# Altium PCB 74HC595.PcbDoc
Units mil, origin at the board's own origin, x right, y up, seen from the top; angles counter-clockwise.
Board outline 450 x 3200 mil, 2 copper layers (Top Layer, Bottom Layer); 74 components, 74 nets, 204 pads, 68 vias.
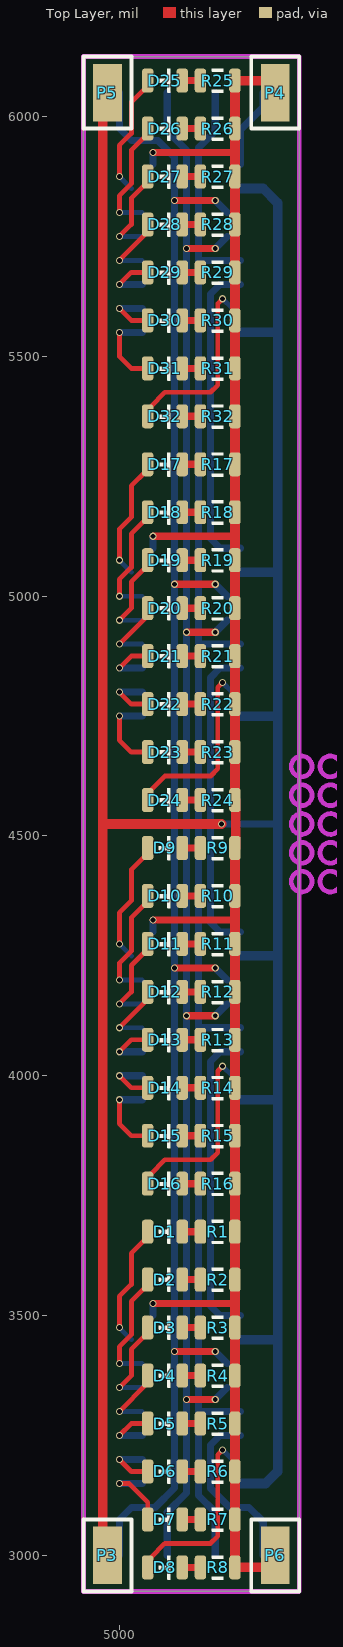
[diagram p0: Top Layer view]
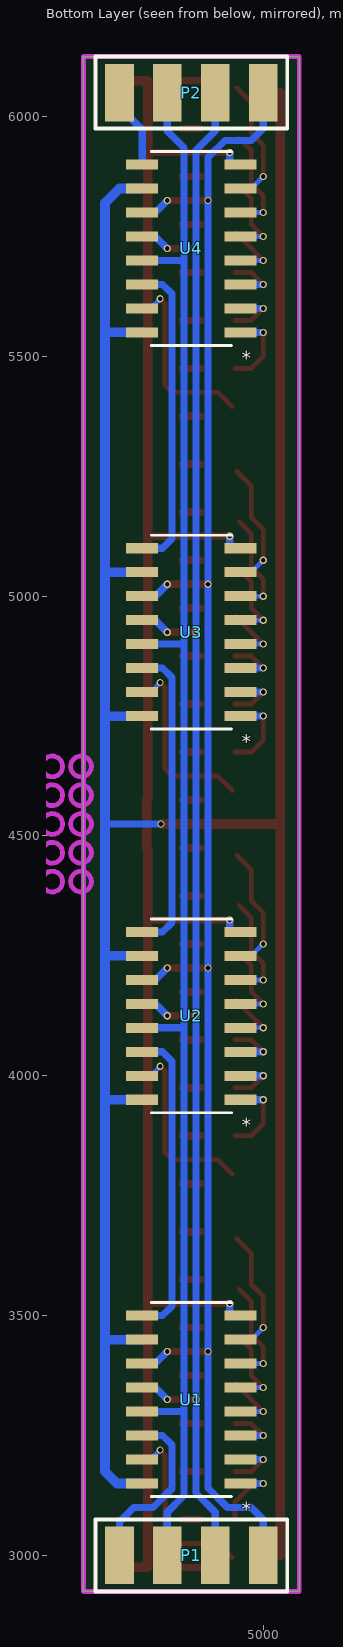
[diagram p1: Bottom Layer view, seen from below]
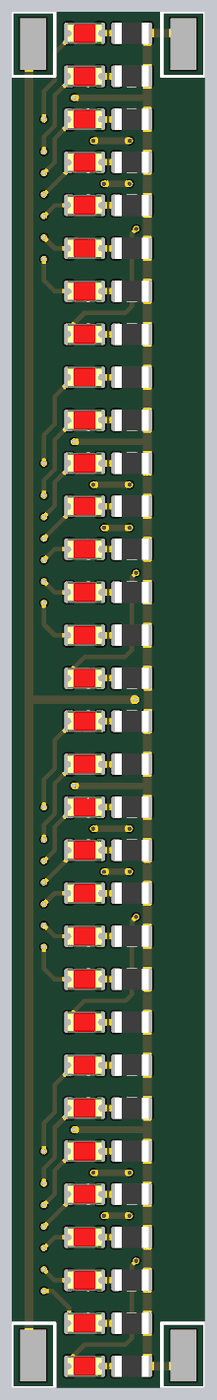
[diagram p2: 3D render of the assembled board from above, using the file's embedded part models]
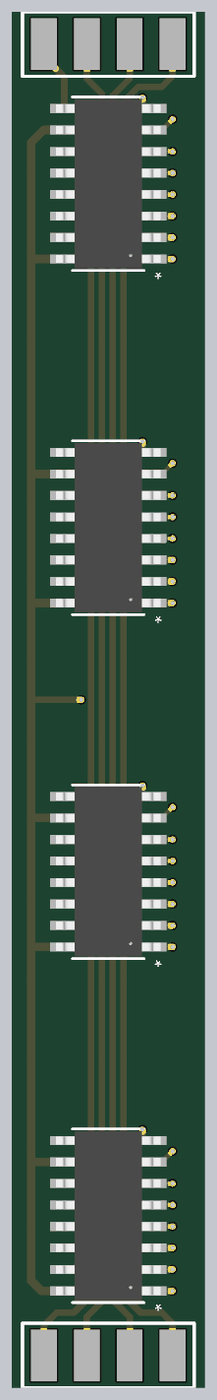
[diagram p3: 3D render of the assembled board from below, using the file's embedded part models]

## Layer stack, top to bottom
Top Solder: solder mask 0.4, Solder Resist, Dk 3.5
Top Layer: signal copper 1.4
Dielectric 1: dielectric 12.6, FR-4, Dk 4.8
Bottom Layer: signal copper 1.4
Bottom Solder: solder mask 0.4, Solder Resist, Dk 3.5

## Board outline
4925,2925 4925,6125 5375,6125 5375,2925

## Design rules (kind name [scope] priority, off if disabled: settings)
Clearance [All] p1: gap=8
PolygonConnect [All] p1: connectstyle=Relief reliefconductorwidth=10 reliefentries=4 polygonreliefangle="90 Angle" airgapwidth=10
RoutingVias [All] p1: holewidth=10 width=15 viastyle="Through Hole" minholewidth=8 minwidth=10 maxholewidth=50 maxwidth=60
SolderMaskExpansion [All] p1: expansion=4
Width [All] p1: maxlimit=50 minlimit=10 preferedwidth=15
30 further rules are at their usual default settings.

## Components (designator, comment, footprint, x,y, rotation, side; value= is the part's Value field where it differs from the comment)
D1 "color?" LED_0805_RED 5095,3675 r180 top
D2 "color?" LED_0805_RED 5095,3575 r180 top
D3 "color?" LED_0805_RED 5095,3475 r180 top
D4 "color?" LED_0805_RED 5095,3375 r180 top
D5 "color?" LED_0805_RED 5095,3275 r180 top
D6 "color?" LED_0805_RED 5095,3175 r180 top
D7 "color?" LED_0805_RED 5095,3075 r180 top
D8 "color?" LED_0805_RED 5095,2975 r180 top
D9 "color?" LED_0805_RED 5095,4475 r180 top
D10 "color?" LED_0805_RED 5095,4375 r180 top
D11 "color?" LED_0805_RED 5095,4275 r180 top
D12 "color?" LED_0805_RED 5095,4175 r180 top
D13 "color?" LED_0805_RED 5095,4075 r180 top
D14 "color?" LED_0805_RED 5095,3975 r180 top
D15 "color?" LED_0805_RED 5095,3875 r180 top
D16 "color?" LED_0805_RED 5095,3775 r180 top
D17 "color?" LED_0805_RED 5095,5275 r180 top
D18 "color?" LED_0805_RED 5095,5175 r180 top
D19 "color?" LED_0805_RED 5095,5075 r180 top
D20 "color?" LED_0805_RED 5095,4975 r180 top
D21 "color?" LED_0805_RED 5095,4875 r180 top
D22 "color?" LED_0805_RED 5095,4775 r180 top
D23 "color?" LED_0805_RED 5095,4675 r180 top
D24 "color?" LED_0805_RED 5095,4575 r180 top
D25 "color?" LED_0805_RED 5095,6075 r180 top
D26 "color?" LED_0805_RED 5095,5975 r180 top
D27 "color?" LED_0805_RED 5095,5875 r180 top
D28 "color?" LED_0805_RED 5095,5775 r180 top
D29 "color?" LED_0805_RED 5095,5675 r180 top
D30 "color?" LED_0805_RED 5095,5575 r180 top
D31 "color?" LED_0805_RED 5095,5475 r180 top
D32 "color?" LED_0805_RED 5095,5375 r180 top
P1 "Header 4" HDR1X4_SOP 5000,3000 r0 bottom locked
P2 "Header 4" HDR1X4_SOP 5000,6050 r0 bottom locked
P3 "Header 1" HDR1X1_SOP 4975,3000 r0 top locked
P4 "Header 1" HDR1X1_SOP 5325,6050 r0 top locked
P5 "Header 1" HDR1X1_SOP 4975,6050 r0 top locked
P6 "Header 1" HDR1X1_SOP 5325,3000 r0 top locked
R1 "R0805" RES_0805 5205,3675 r0 top
R2 "R0805" RES_0805 5205,3575 r0 top
R3 "R0805" RES_0805 5205,3475 r0 top
R4 "R0805" RES_0805 5205,3375 r0 top
R5 "R0805" RES_0805 5205,3275 r0 top
R6 "R0805" RES_0805 5205,3175 r0 top
R7 "R0805" RES_0805 5205,3075 r0 top
R8 "R0805" RES_0805 5205,2975 r0 top
R9 "R0805" RES_0805 5205,4475 r0 top
R10 "R0805" RES_0805 5205,4375 r0 top
R11 "R0805" RES_0805 5205,4275 r0 top
R12 "R0805" RES_0805 5205,4175 r0 top
R13 "R0805" RES_0805 5205,4075 r0 top
R14 "R0805" RES_0805 5205,3975 r0 top
R15 "R0805" RES_0805 5205,3875 r0 top
R16 "R0805" RES_0805 5205,3775 r0 top
R17 "R0805" RES_0805 5205,5275 r0 top
R18 "R0805" RES_0805 5205,5175 r0 top
R19 "R0805" RES_0805 5205,5075 r0 top
R20 "R0805" RES_0805 5205,4975 r0 top
R21 "R0805" RES_0805 5205,4875 r0 top
R22 "R0805" RES_0805 5205,4775 r0 top
R23 "R0805" RES_0805 5205,4675 r0 top
R24 "R0805" RES_0805 5205,4575 r0 top
R25 "R0805" RES_0805 5205,6075 r0 top
R26 "R0805" RES_0805 5205,5975 r0 top
R27 "R0805" RES_0805 5205,5875 r0 top
R28 "R0805" RES_0805 5205,5775 r0 top
R29 "R0805" RES_0805 5205,5675 r0 top
R30 "R0805" RES_0805 5205,5575 r0 top
R31 "R0805" RES_0805 5205,5475 r0 top
R32 "R0805" RES_0805 5205,5375 r0 top
U1 "74HC595D,112" SOT109-1_NEX 5150,3325 r0 bottom locked
U2 "74HC595D,112" SOT109-1_NEX 5150,4125 r0 bottom locked
U3 "74HC595D,112" SOT109-1_NEX 5150,4925 r0 bottom locked
U4 "74HC595D,112" SOT109-1_NEX 5150,5725 r0 bottom

## Footprints (in the part's own frame and the unit in brackets; to place one, negate y for a bottom-side part, rotate by r counter-clockwise, add the part's x,y. Pads: shape width x height; smd on the part's side, far side on the other; paste and mask are expansions set on the pad)
HDR1X1_SOP [mil]
  rect 60x120 smd: 1(0,0)
  silkscreen extent -50,-75 50,75
HDR1X4_SOP [mil]
  rect 60x120 smd: 1(0,0) 2(100,0) 3(200,0) 4(300,0)
  silkscreen extent -50,-75 350,75
LED_0805_RED [mil]
  rrect50% 24x50 smd: 1(-36,0) 2(36,0)
  silkscreen extent -12,-24 12,24, body extent -40,-25 40,25, height 43
RES_0805 [mil]
  rrect50% 24x50 smd: 1(-36,0) 2(36,0)
  silkscreen extent -12,-24 12,24, body extent -39,-25 39,25, height 24
SOT109-1_NEX [mil]
  rect 67x21 smd paste+0 mask+0: 1(-102.5,175) 2(-102.5,125) 3(-102.5,75) 4(-102.5,25) 5(-102.5,-25) 6(-102.5,-75) 7(-102.5,-125) 8(-102.5,-175) 9(102.5,-175) 10(102.5,-125) 11(102.5,-75) 12(102.5,-25) 13(102.5,25) 14(102.5,75) 15(102.5,125) 16(102.5,175)
  silkscreen extent -84,-202 84,202, body extent -122,-197 122,197, height 69

## Part data
D1 D2 D3 D4 D5 D6 D7 D8 D9 D10 D11 D12 D13 D14 D15 D16 D17 D18 D19 D20 D21 D22 D23 D24 D25 D26 D27 D28 D29 D30 D31 D32: library part LED_0805, "LED"
P1 P2: "Header, 4-Pin"
P3 P4 P5 P6: "Header, 1-Pin"
R1 R2 R3 R4 R5 R6 R7 R8 R9 R10 R11 R12 R13 R14 R15 R16 R17 R18 R19 R20 R21 R22 R23 R24 R25 R26 R27 R28 R29 R30 R31 R32: library part Res_0805, "Resistor"
U1 U2 U3 U4: "No Description Available"

## Via types
v1: diameter 15, hole 10, Top Layer to Bottom Layer, 68 vias

## Nets (pads, with @x,y where several pads share a name; then routed paths per layer and width w, separated by ;. In a path a pad name is that pad's centre, name@x,y a point inside that pad or via, vN(x,y) a via of type N, cw(c..) or ccw(c..) an arc to the next point about the centre after c; other vN are vias at no path point)
BITOUT_A: U1.9 U2.14 | length 722.4
  Bottom Layer w15: U1.9 5210,3500 5190,3520 5190,4030 ; 5190,4030 5210,4050 ; 5190,4030 5210,4050 ; 5210,4050 U2.14 5210,4050
BITOUT_B: U2.9 U3.14 | length 793.1
  Bottom Layer w15: U2.9 5210,4300 5190,4320 5190,4830 ; 5190,4830 5210,4850 ; 5190,4830 5210,4850 ; 5190,4830 5210,4850 ; 5210,4850 U3.14 ; 5210,4850 U3.14 ; 5210,4850 U3.14
BITOUT_C: U3.9 U4.14 | length 722.4
  Bottom Layer w15: U4.14 5210,5650 5190,5630 5190,5120 ; 5190,5120 5210,5100 ; 5190,5120 5210,5100 ; 5210,5100 U3.9 5210,5100
BITOUT_D: P2.4 U4.9 | length 169.7
  Bottom Layer w15: U4.9 5252.5,5972.5 5300,6020 P2.4
BITSCLK: P1.1 P2.1 U1.11 U2.11 U3.11 U4.11 | length 3688.2
  Top Layer w15: v1(5115,3425) v1(5200,3425) ; v1(5115,4225) v1(5200,4225) ; v1(5115,5025) v1(5200,5025) ; v1(5115,5825) v1(5200,5825)
  Bottom Layer w15: P1.1 5000,3075 5025,3100 5075,3100 5075,3100.36 5115,3140.36 v1(5115,4225) v1(5115,5025) v1(5115,5825) 5115,5915 5080,5950 5025,5950 5000,5975 P2.1 ; v1(5200,3425) U1.11@5225,3400 ; v1(5200,4225) U2.11@5225,4200 ; v1(5200,5025) U3.11@5225,5000 ; v1(5200,5825) U4.11@5225,5800
DATAINPUT: P1.4 U1.14 | length 440.6
  Bottom Layer w15: P1.4 5300,3070 5270,3100 5230,3100 5190,3140 5190,3230 ; 5190,3230 5210,3250 ; 5190,3230 5210,3250 ; 5210,3250 U1.14 5210,3250
GND: P4.1 P6.1 R1.2 R2.2 R3.2 R4.2 R5.2 R6.2 R7.2 R8.2 R9.2 R10.2 R11.2 R12.2 R13.2 R14.2 R15.2 R16.2 R17.2 R18.2 R19.2 R20.2 R21.2 R22.2 R23.2 R24.2 R25.2 R26.2 R27.2 R28.2 R29.2 R30.2 R31.2 R32.2 U1.8 U2.8 U3.8 U4.8 | length 4002
  Top Layer w15: v1(5070,3525) 5241,3525 ; v1(5070,4325) 5241,4325 ; v1(5070,5125) 5241,5125 ; v1(5070,5925) 5241,5925
  Top Layer w20: R9.2 R10.2 5241,4325 R11.2 R12.2 R13.2 R14.2 R15.2 R16.2 R1.2 R2.2 5241,3525 R3.2 R4.2 R5.2 R6.2 R7.2 R8.2 P6.1@5300,2975 ; R24.2 R23.2 R22.2 R21.2 R20.2 R19.2 5241,5125 R18.2 R17.2 R32.2 R31.2 R30.2 R29.2 R28.2 R27.2 5241,5925 R26.2 R25.2 P4.1@5300,6075 ; R9.2@5243,4475 R24.2@5243,4575
  Bottom Layer w15: U1.8@5070,3500 v1(5070,3525) ; U2.8@5070,4300 v1(5070,4325) ; U3.8@5070,5100 v1(5070,5125) ; U4.8@5070,5900 v1(5070,5925)
MEMSCLK: P1.2 P2.2 U1.12 U2.12 U3.12 U4.12 | length 3464.6
  Top Layer w15: v1(5140,3325) v1(5200,3325) ; v1(5140,4125) v1(5200,4125) ; v1(5140,4925) v1(5200,4925) ; v1(5140,5725) v1(5200,5725)
  Bottom Layer w15: P1.2 5100,3090 5140,3130 v1(5140,4125) v1(5140,4925) v1(5140,5725) 5140,5930 5100,5970 P2.2 ; v1(5200,3325) U1.12@5225,3350 ; v1(5200,4125) U2.12@5225,4150 ; v1(5200,4925) U3.12@5225,4950 ; v1(5200,5725) U4.12@5225,5750
NetD1_1: D1.1 R1.1 | length 39
  Top Layer w15: D1.1@5130,3675 R1.1
NetD2_1: D2.1 R2.1 | length 39
  Top Layer w15: D2.1@5130,3575 R2.1
NetD3_1: D3.1 R3.1 | length 39
  Top Layer w15: D3.1@5130,3475 R3.1
NetD4_1: D4.1 R4.1 | length 39
  Top Layer w15: D4.1@5130,3375 R4.1
NetD5_1: D5.1 R5.1 | length 39
  Top Layer w15: D5.1@5130,3275 R5.1
NetD6_1: D6.1 R6.1 | length 39
  Top Layer w15: D6.1@5130,3175 R6.1
NetD7_1: D7.1 R7.1 | length 39
  Top Layer w15: D7.1@5130,3075 R7.1
NetD8_1: D8.1 R8.1 | length 39
  Top Layer w15: D8.1@5130,2975 R8.1
NetD9_1: D9.1 R9.1 | length 39
  Top Layer w15: D9.1@5130,4475 R9.1
NetD10_1: D10.1 R10.1 | length 39
  Top Layer w15: D10.1@5130,4375 R10.1
NetD11_1: D11.1 R11.1 | length 39
  Top Layer w15: D11.1@5130,4275 R11.1
NetD12_1: D12.1 R12.1 | length 39
  Top Layer w15: D12.1@5130,4175 R12.1
NetD13_1: D13.1 R13.1 | length 39
  Top Layer w15: D13.1@5130,4075 R13.1
NetD14_1: D14.1 R14.1 | length 39
  Top Layer w15: D14.1@5130,3975 R14.1
NetD15_1: D15.1 R15.1 | length 39
  Top Layer w15: D15.1@5130,3875 R15.1
NetD16_1: D16.1 R16.1 | length 39
  Top Layer w15: D16.1@5130,3775 R16.1
NetD17_1: D17.1 R17.1 | length 39
  Top Layer w15: D17.1@5130,5275 R17.1
NetD18_1: D18.1 R18.1 | length 39
  Top Layer w15: D18.1@5130,5175 R18.1
NetD19_1: D19.1 R19.1 | length 39
  Top Layer w15: D19.1@5130,5075 R19.1
NetD20_1: D20.1 R20.1 | length 39
  Top Layer w15: D20.1@5130,4975 R20.1
NetD21_1: D21.1 R21.1 | length 39
  Top Layer w15: D21.1@5130,4875 R21.1
NetD22_1: D22.1 R22.1 | length 39
  Top Layer w15: D22.1@5130,4775 R22.1
NetD23_1: D23.1 R23.1 | length 39
  Top Layer w15: D23.1@5130,4675 R23.1
NetD24_1: D24.1 R24.1 | length 39
  Top Layer w15: D24.1@5130,4575 R24.1
NetD25_1: D25.1 R25.1 | length 39
  Top Layer w15: D25.1@5130,6075 R25.1
NetD26_1: D26.1 R26.1 | length 39
  Top Layer w15: D26.1@5130,5975 R26.1
NetD27_1: D27.1 R27.1 | length 39
  Top Layer w15: D27.1@5130,5875 R27.1
NetD28_1: D28.1 R28.1 | length 39
  Top Layer w15: D28.1@5130,5775 R28.1
NetD29_1: D29.1 R29.1 | length 39
  Top Layer w15: D29.1@5130,5675 R29.1
NetD30_1: D30.1 R30.1 | length 39
  Top Layer w15: D30.1@5130,5575 R30.1
NetD31_1: D31.1 R31.1 | length 39
  Top Layer w15: D31.1@5130,5475 R31.1
NetD32_1: D32.1 R32.1 | length 39
  Top Layer w15: D32.1@5130,5375 R32.1
OUTENABLE: P1.3 P2.3 U1.13 U2.13 U3.13 U4.13 | length 3429
  Bottom Layer w15: 5165,3300 U1.13 ; 5165,4100 U2.13 ; 5165,4900 U3.13 ; P1.3 5200,3090 5165,3125 5165,5700 ; P2.3 5200,5970 5165,5935 5165,5700 ; U4.13 5165,5700
Q_A0: D8.2 U1.15 | length 371.1
  Top Layer w10: D8.2@5065,2995 5095,3025 5190,3025 5205,3040 5205,3210 v1(5215,3220)
  Bottom Layer w10: v1(5215,3220) U1.15@5235,3200
Q_A1: D7.2 U1.1 | length 158.7
  Top Layer w10: v1(5000,3150) 5020,3150 5059,3111 D7.2
  Bottom Layer w15: v1(5000,3150) U1.1
Q_A2: D6.2 U1.2 | length 116.9
  Top Layer w10: v1(5000,3200) 5025,3175 D6.2
  Bottom Layer w15: v1(5000,3200) U1.2
Q_A3: D5.2 U1.3 | length 116.9
  Top Layer w10: v1(5000,3250) 5025,3275 D5.2
  Bottom Layer w15: v1(5000,3250) U1.3
  other v1: 5000,3250
Q_A4: D4.2 U1.4 | length 128.8
  Top Layer w10: v1(5000,3300) D4.2@5057.5,3357.5
  Bottom Layer w10: v1(5000,3300) U1.4
  other v1: 5000,3300
Q_A5: D3.2 U1.5 | length 173.2
  Top Layer w10: v1(5000,3350) 5025,3375 5025,3430 D3.2@5050,3455
  Bottom Layer w10: v1(5000,3350) U1.5
  other v1: 5000,3350
Q_A6: D2.2 U1.6 | length 223.2
  Top Layer w10: v1(5000,3400) 5000,3435 5025,3460 5025,3530 D2.2@5050,3555
  Bottom Layer w10: v1(5000,3400) U1.6
  other v1: 5000,3400
Q_A7: D1.2 U1.7 | length 243.1
  Top Layer w10: v1(5000,3475) 5000,3540 5025,3565 5025,3630 D1.2@5055,3660
  Bottom Layer w10: v1(5000,3475) U1.7@5025,3450
  other v1: 5000,3475
Q_B0: D16.2 U2.15 | length 371.1
  Top Layer w10: D16.2@5065,3795 5095,3825 5190,3825 5205,3840 5205,4010 v1(5215,4020)
  Bottom Layer w10: v1(5215,4020) U2.15@5235,4000
Q_B1: D15.2 U2.1 | length 166.9
  Top Layer w10: v1(5000,3950) 5000,3900 5025,3875 D15.2
  Bottom Layer w15: v1(5000,3950) U2.1
Q_B2: D14.2 U2.2 | length 116.9
  Top Layer w10: v1(5000,4000) 5025,3975 D14.2
  Bottom Layer w15: v1(5000,4000) U2.2
Q_B3: D13.2 U2.3 | length 116.9
  Top Layer w10: v1(5000,4050) 5025,4075 D13.2
  Bottom Layer w15: v1(5000,4050) U2.3
  other v1: 5000,4050
Q_B4: D12.2 U2.4 | length 128.8
  Top Layer w10: v1(5000,4100) D12.2@5057.5,4157.5
  Bottom Layer w10: v1(5000,4100) U2.4
  other v1: 5000,4100
Q_B5: D11.2 U2.5 | length 173.2
  Top Layer w10: v1(5000,4150) 5025,4175 5025,4230 D11.2@5050,4255
  Bottom Layer w10: v1(5000,4150) U2.5
  other v1: 5000,4150
Q_B6: D10.2 U2.6 | length 223.2
  Top Layer w10: v1(5000,4200) 5000,4235 5025,4260 5025,4330 D10.2@5050,4355
  Bottom Layer w10: v1(5000,4200) U2.6
  other v1: 5000,4200
Q_B7: D9.2 U2.7 | length 243.1
  Top Layer w10: v1(5000,4275) 5000,4340 5025,4365 5025,4430 D9.2@5055,4460
  Bottom Layer w10: v1(5000,4275) U2.7@5025,4250
  other v1: 5000,4275
Q_C0: D24.2 U3.15 | length 371.1
  Top Layer w10: D24.2@5065,4595 5095,4625 5190,4625 5205,4640 5205,4810 v1(5215,4820)
  Bottom Layer w10: v1(5215,4820) U3.15@5235,4800
Q_C1: D23.2 U3.1 | length 166.9
  Top Layer w10: v1(5000,4750) 5000,4700 5025,4675 D23.2
  Bottom Layer w15: v1(5000,4750) U3.1
Q_C2: D22.2 U3.2 | length 116.9
  Top Layer w10: v1(5000,4800) 5025,4775 D22.2
  Bottom Layer w15: v1(5000,4800) U3.2
Q_C3: D21.2 U3.3 | length 164.4
  Top Layer w10: v1(5000,4850) 5025,4875 D21.2
  Bottom Layer w15: v1(5000,4850) U3.3 v1(5000,4850)
  other v1: 5000,4850
Q_C4: D20.2 U3.4 | length 176.3
  Top Layer w10: v1(5000,4900) D20.2@5057.5,4957.5
  Bottom Layer w10: v1(5000,4900) U3.4 v1(5000,4900)
  other v1: 5000,4900
Q_C5: D19.2 U3.5 | length 173.2
  Top Layer w10: v1(5000,4950) 5025,4975 5025,5030 D19.2@5050,5055
  Bottom Layer w10: v1(5000,4950) U3.5
  other v1: 5000,4950
Q_C6: D18.2 U3.6 | length 223.2
  Top Layer w10: v1(5000,5000) 5000,5035 5025,5060 5025,5130 D18.2@5050,5155
  Bottom Layer w10: v1(5000,5000) U3.6
  other v1: 5000,5000
Q_C7: D17.2 U3.7 | length 243.1
  Top Layer w10: v1(5000,5075) 5000,5140 5025,5165 5025,5230 D17.2@5055,5260
  Bottom Layer w10: v1(5000,5075) U3.7@5025,5050
  other v1: 5000,5075
Q_D0: D32.2 U4.15 | length 371.1
  Top Layer w10: D32.2@5065,5395 5095,5425 5190,5425 5205,5440 5205,5610 v1(5215,5620)
  Bottom Layer w10: v1(5215,5620) U4.15@5235,5600
Q_D1: D31.2 U4.1 | length 166.9
  Top Layer w10: v1(5000,5550) 5000,5500 5025,5475 D31.2
  Bottom Layer w15: v1(5000,5550) U4.1
Q_D2: D30.2 U4.2 | length 116.9
  Top Layer w10: v1(5000,5600) 5025,5575 D30.2
  Bottom Layer w15: v1(5000,5600) U4.2
Q_D3: D29.2 U4.3 | length 116.9
  Top Layer w10: v1(5000,5650) 5025,5675 D29.2
  Bottom Layer w15: v1(5000,5650) U4.3
Q_D4: D28.2 U4.4 | length 128.8
  Top Layer w10: v1(5000,5700) D28.2@5057.5,5757.5
  Bottom Layer w10: v1(5000,5700) U4.4
Q_D5: D27.2 U4.5 | length 173.2
  Top Layer w10: v1(5000,5750) 5025,5775 5025,5830 D27.2@5050,5855
  Bottom Layer w10: v1(5000,5750) U4.5
Q_D6: D26.2 U4.6 | length 223.2
  Top Layer w10: v1(5000,5800) 5000,5835 5025,5860 5025,5930 D26.2@5050,5955
  Bottom Layer w10: v1(5000,5800) U4.6
Q_D7: D25.2 U4.7 | length 243.1
  Top Layer w10: v1(5000,5875) 5000,5940 5025,5965 5025,6030 D25.2@5055,6060
  Bottom Layer w10: v1(5000,5875) U4.7@5025,5850
VCC: P3.1 P5.1 U1.10 U1.16 U2.10 U2.16 U3.10 U3.16 U4.10 U4.16 | length 6738.1
  Top Layer w10: P3.1 P3.1@5000,2975
  Top Layer w20: P3.1@4965,3000 4965,4525 ; P5.1@4965,6050 4965,4525 ; v1(5213,4525) 4965,4525
  Bottom Layer w15: v1(5213,4525) 5330,4525
  Bottom Layer w20: U1.16 5305,3150 5330,3175 5330,3450 ; U1.10 5330,3450 ; U2.16 5330,3950 ; U2.10 5330,4250 ; U3.16 5330,4750 ; U3.10 5330,5050 ; U4.16 5330,5550 ; U4.10 5300,5850 5330,5820 5330,5550 ; 5330,3450 5330,3950 ; 5330,3950 5330,4250 ; 5330,4250 5330,4525 5330,4750 ; 5330,4750 5330,5050 ; 5330,5050 5330,5550

## Keep-outs
Keep-Out Layer:
  circle w10: c5380,4405 r21.65
  circle w10: c5380,4465 r21.65
  circle w10: c5380,4525 r21.65
  circle w10: c5380,4585 r21.65
  circle w10: c5380,4645 r21.65
  circle w10: c5440,4645 r21.65
  circle w10: c5440,4585 r21.65
  circle w10: c5440,4525 r21.65
  circle w10: c5440,4465 r21.65
  circle w10: c5440,4405 r21.65
  lines w10: 4925,2925 4925,6125 5375,6125 5375,2925 4925,2925

## Text inside footprints (layer, text, board x,y; h text height)
U1: Mechanical 13 "*" at 5074,3181 h50 r180; Bottom Overlay "*" at 5025,3134 h50 r180
U2: Mechanical 13 "*" at 5074,3981 h50 r180; Bottom Overlay "*" at 5025,3934 h50 r180
U3: Mechanical 13 "*" at 5074,4781 h50 r180; Bottom Overlay "*" at 5025,4734 h50 r180
U4: Mechanical 13 "*" at 5074,5581 h50 r180; Bottom Overlay "*" at 5025,5534 h50 r180